# Altium PCB NaviGo v3.0.PcbDoc (part 3 of 4)
Units mm, origin at the board's own origin, x right, y up, seen from the top; angles counter-clockwise.
Board outline 144.78 x 52.07 mm, 2 copper layers (Top Layer, Bottom Layer); 380 components, 29 nets, 1630 pads, 230 vias.
Unrouted connection lines stored in the file: 261.
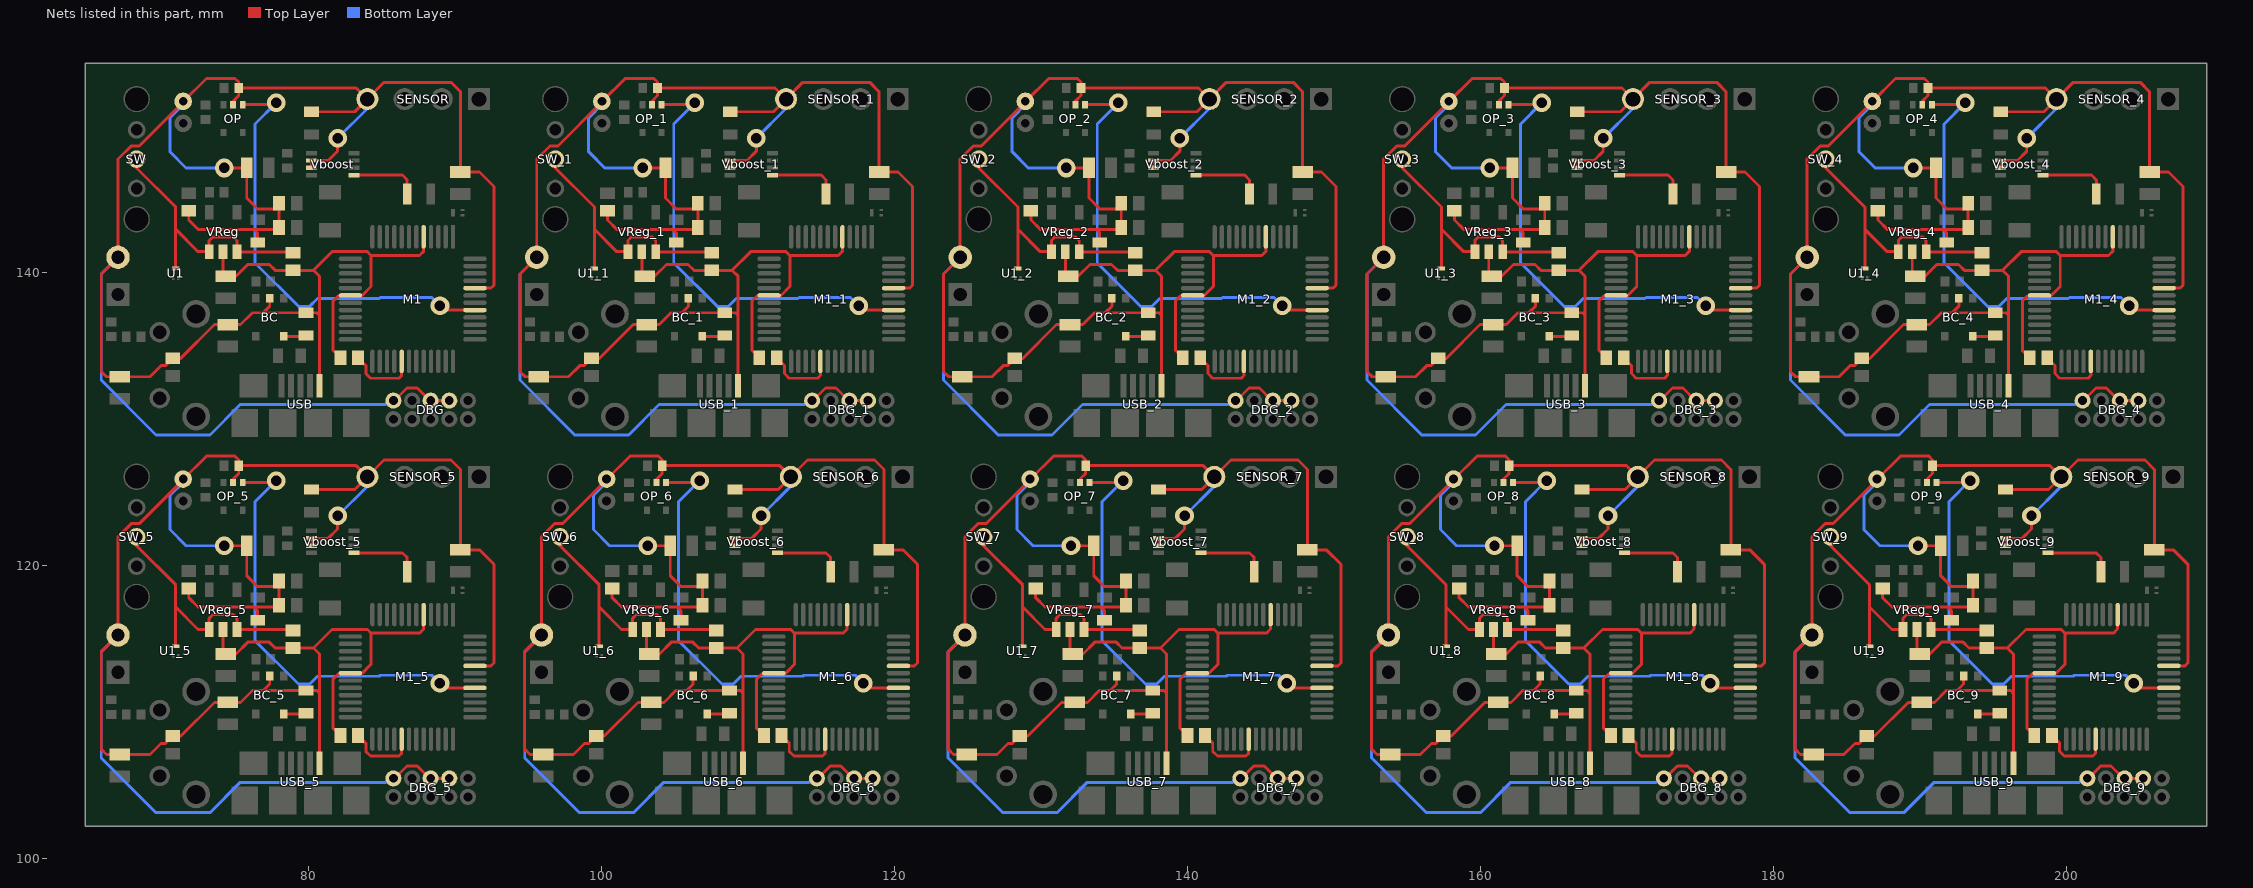
[diagram p3: the nets of this part, all layers, seen from the top]

## Via types
v1: diameter 1.27, hole 0.711, Top Layer to Bottom Layer, 220 vias
v2: diameter 1.1, hole 0.711, Top Layer to Bottom Layer, 10 vias

## Nets (pads, with @x,y where several pads share a name; then routed paths per layer and width w, separated by ;. In a path a pad name is that pad's centre, name@x,y a point inside that pad or via, vN(x,y) a via of type N, cw(c..) or ccw(c..) an arc to the next point about the centre after c; other vN are vias at no path point) (continued)
GND: BC.2 BC_1.2 BC_2.2 BC_3.2 BC_4.2 BC_5.2 BC_6.2 BC_7.2 BC_8.2 BC_9.2 BT1.2 BT1_1.2 BT1_2.2 BT1_3.2 BT1_4.2 BT1_5.2 BT1_6.2 BT1_7.2 BT1_8.2 BT1_9.2 C1.2 C1_1.2 C1_2.2 C1_3.2 C1_4.2 C1_5.2 C1_6.2 C1_7.2 C1_8.2 C1_9.2 C2.2 C2_1.2 C2_2.2 C2_3.2 C2_4.2 C2_5.2 C2_6.2 C2_7.2 C2_8.2 C2_9.2 C4.2 C4_1.2 C4_2.2 C4_3.2 C4_4.2 C4_5.2 C4_6.2 C4_7.2 C4_8.2 C4_9.2 C5.2 C5_1.2 C5_2.2 C5_3.2 C5_4.2 C5_5.2 C5_6.2 C5_7.2 C5_8.2 C5_9.2 C6.2 C6_1.2 C6_2.2 C6_3.2 C6_4.2 C6_5.2 C6_6.2 C6_7.2 C6_8.2 C6_9.2 C7.2 C7_1.2 C7_2.2 C7_3.2 C7_4.2 C7_5.2 C7_6.2 C7_7.2 C7_8.2 C7_9.2 C8.2 C8_1.2 C8_2.2 C8_3.2 C8_4.2 C8_5.2 C8_6.2 C8_7.2 C8_8.2 C8_9.2 C10.2 C10_1.2 C10_2.2 C10_3.2 C10_4.2 C10_5.2 C10_6.2 C10_7.2 C10_8.2 C10_9.2 C11.2 C11_1.2 C11_2.2 C11_3.2 C11_4.2 C11_5.2 C11_6.2 C11_7.2 C11_8.2 C11_9.2 C12.1 C12_1.1 C12_2.1 C12_3.1 C12_4.1 C12_5.1 C12_6.1 C12_7.1 C12_8.1 C12_9.1 C13.1 C13_1.1 C13_2.1 C13_3.1 C13_4.1 C13_5.1 C13_6.1 C13_7.1 C13_8.1 C13_9.1 DBG.6 DBG.8 DBG.9 DBG_1.6 DBG_1.8 DBG_1.9 DBG_2.6 DBG_2.8 DBG_2.9 DBG_3.6 DBG_3.8 DBG_3.9 DBG_4.6 DBG_4.8 DBG_4.9 DBG_5.6 DBG_5.8 DBG_5.9 DBG_6.6 DBG_6.8 DBG_6.9 DBG_7.6 DBG_7.8 DBG_7.9 DBG_8.6 DBG_8.8 DBG_8.9 DBG_9.6 DBG_9.8 DBG_9.9 M1.5 M1.18 M1.44 M1_1.5 M1_1.18 M1_1.44 M1_2.5 M1_2.18 M1_2.44 M1_3.5 M1_3.18 M1_3.44 M1_4.5 M1_4.18 M1_4.44 M1_5.5 M1_5.18 M1_5.44 M1_6.5 M1_6.18 M1_6.44 M1_7.5 M1_7.18 M1_7.44 M1_8.5 M1_8.18 M1_8.44 M1_9.5 M1_9.18 M1_9.44 MOTOR.2 MOTOR_1.2 MOTOR_2.2 MOTOR_3.2 MOTOR_4.2 MOTOR_5.2 MOTOR_6.2 MOTOR_7.2 MOTOR_8.2 MOTOR_9.2 OP.2 OP_1.2 OP_2.2 OP_3.2 OP_4.2 OP_5.2 OP_6.2 OP_7.2 OP_8.2 OP_9.2 R2.2 R2_1.2 R2_2.2 R2_3.2 R2_4.2 R2_5.2 R2_6.2 R2_7.2 R2_8.2 R2_9.2 R5.2 R5_1.2 R5_2.2 R5_3.2 R5_4.2 R5_5.2 R5_6.2 R5_7.2 R5_8.2 R5_9.2 R9.1 R9_1.1 R9_2.1 R9_3.1 R9_4.1 R9_5.1 R9_6.1 R9_7.1 R9_8.1 R9_9.1 R10.2 R10_1.2 R10_2.2 R10_3.2 R10_4.2 R10_5.2 R10_6.2 R10_7.2 R10_8.2 R10_9.2 SENSOR.4 SENSOR_1.4 SENSOR_2.4 SENSOR_3.4 SENSOR_4.4 SENSOR_5.4 SENSOR_6.4 SENSOR_7.4 SENSOR_8.4 SENSOR_9.4 USB.5 USB_1.5 USB_2.5 USB_3.5 USB_4.5 USB_5.5 USB_6.5 USB_7.5 USB_8.5 USB_9.5 Vboost.2 Vboost.3 Vboost_1.2 Vboost_1.3 Vboost_2.2 Vboost_2.3 Vboost_3.2 Vboost_3.3 Vboost_4.2 Vboost_4.3 Vboost_5.2 Vboost_5.3 Vboost_6.2 Vboost_6.3 Vboost_7.2 Vboost_7.3 Vboost_8.2 Vboost_8.3 Vboost_9.2 Vboost_9.3 VReg.2 VReg_1.2 VReg_2.2 VReg_3.2 VReg_4.2 VReg_5.2 VReg_6.2 VReg_7.2 VReg_8.2 VReg_9.2 | length 1830.6
  Top Layer w0.2: C12_5.1@71.831,118.459 71.831,117.824 72.466,117.189 76.276,117.189 ; C12.1@71.831,144.24 71.831,143.605 72.466,142.97 76.276,142.97 ; VReg_5.2@74.178,115.665 74.178,114.183 C10_5.2@74.371,113.99 75.051,113.99 75.856,114.795 77.331,114.795 77.731,114.395 C13_5.1@78.943,114.395 80.34,114.395 ; VReg.2@74.178,141.446 74.178,139.964 C10.2@74.371,139.771 75.051,139.771 75.856,140.576 77.331,140.576 77.731,140.176 C13.1@78.943,140.176 80.34,140.176 ; v1(74.244,121.38) C2_5.2@75.792,121.38 75.792,119.324 76.53,118.586 C5_5.2@77.997,118.586 ; v1(74.244,147.161) C2.2@75.792,147.161 75.792,145.105 76.53,144.367 C5.2@77.997,144.367 ; OP_5.2@74.864,125.698 74.864,125.937 75.244,126.317 R5_5.2@75.244,126.841 ; OP.2@74.864,151.479 74.864,151.718 75.244,152.098 R5.2@75.244,152.622 ; R9_5.1@76.53,116.3 76.53,116.935 76.276,117.189 ; R9.1@76.53,142.081 76.53,142.716 76.276,142.97 ; BC_5.2@77.358,112.49 77.358,111.947 76.911,111.5 ; BC.2@77.358,138.271 77.358,137.728 76.911,137.281 ; C5_5.2@77.997,118.713 C5_5.2@77.997,118.586 ; C5.2@77.997,144.494 C5.2@77.997,144.367 ; Vboost_5.2@80.196,121.88 80.207,121.88 Vboost_5.3@80.207,121.391 ; Vboost.2@80.196,147.661 80.207,147.661 Vboost.3@80.207,147.172 ; Vboost_5.2@80.207,121.891 81.359,121.891 81.991,122.523 v1(81.991,123.412) ; Vboost.2@80.207,147.672 81.359,147.672 81.991,148.304 v1(81.991,149.193) ; R2_5.2@80.213,125.216 83.16,125.216 SENSOR_5.4@84.023,126.079 ; R2.2@80.213,150.997 83.16,150.997 SENSOR.4@84.023,151.86 ; USB_5.5@80.751,106.91 80.751,111.317 ; USB.5@80.751,132.691 80.751,137.098 ; C4_5.2@82.188,108.426 81.691,108.923 81.691,112.293 82.029,112.631 82.815,112.631 M1_5.18@82.865,112.681 83.667,112.681 84.277,113.291 84.277,115.411 ; C4.2@82.188,134.207 81.691,134.704 81.691,138.074 82.029,138.412 82.815,138.412 M1.18@82.865,138.462 83.667,138.462 84.277,139.072 84.277,141.192 ; DBG_5.6@85.801,105.505 85.869,105.505 86.719,106.355 87.423,106.355 88.273,105.505 DBG_5.8@88.341,105.505 DBG_5.9@89.611,105.505 ; DBG_5.6@85.801,105.759 DBG_5.6@85.869,105.759 ; DBG.6@85.801,131.286 85.869,131.286 86.719,132.136 87.423,132.136 88.273,131.286 DBG.8@88.341,131.286 DBG.9@89.611,131.286 ; DBG.6@85.801,131.54 DBG.6@85.869,131.54 ; M1_5.5@87.865,116.681 87.865,115.697 87.579,115.411 84.277,115.411 ; M1.5@87.865,142.462 87.865,141.478 87.579,141.192 84.277,141.192 ; DBG_5.8@88.273,105.759 DBG_5.8@88.341,105.759 ; DBG.8@88.273,131.54 DBG.8@88.341,131.54 ; M1_5.44@91.365,113.181 92.461,113.181 92.659,113.379 92.659,120.11 91.667,121.102 C1_5.2@90.373,121.102 90.373,126.587 89.738,127.222 85.166,127.222 SENSOR_5.4@84.023,126.079 ; M1.44@91.365,138.962 92.461,138.962 92.659,139.16 92.659,145.891 91.667,146.883 C1.2@90.373,146.883 90.373,152.368 89.738,153.003 85.166,153.003 SENSOR.4@84.023,151.86 ; C12_1.1@100.406,144.24 100.406,143.605 101.041,142.97 104.851,142.97 ; C12_6.1@100.731,118.459 100.731,117.824 101.366,117.189 105.176,117.189 ; VReg_1.2@102.753,141.446 102.753,139.964 C10_1.2@102.946,139.771 103.626,139.771 104.431,140.576 105.906,140.576 106.306,140.176 C13_1.1@107.518,140.176 108.915,140.176 ; v1(102.819,147.161) C2_1.2@104.367,147.161 104.367,145.105 105.105,144.367 C5_1.2@106.572,144.367 ; VReg_6.2@103.078,115.665 103.078,114.183 C10_6.2@103.271,113.99 103.951,113.99 104.756,114.795 106.231,114.795 106.631,114.395 C13_6.1@107.843,114.395 109.24,114.395 ; v1(103.144,121.38) C2_6.2@104.692,121.38 104.692,119.324 105.43,118.586 C5_6.2@106.897,118.586 ; OP_1.2@103.439,151.479 103.439,151.718 103.819,152.098 R5_1.2@103.819,152.622 ; OP_6.2@103.764,125.698 103.764,125.937 104.144,126.317 R5_6.2@104.144,126.841 ; R9_1.1@105.105,142.081 105.105,142.716 104.851,142.97 ; R9_6.1@105.43,116.3 105.43,116.935 105.176,117.189 ; BC_1.2@105.933,138.271 105.933,137.728 105.486,137.281 ; BC_6.2@106.258,112.49 106.258,111.947 105.811,111.5 ; C5_1.2@106.572,144.494 C5_1.2@106.572,144.367 ; C5_6.2@106.897,118.713 C5_6.2@106.897,118.586 ; Vboost_1.2@108.771,147.661 108.782,147.661 Vboost_1.3@108.782,147.172 ; Vboost_1.2@108.782,147.672 109.934,147.672 110.566,148.304 v1(110.566,149.193) ; R2_1.2@108.788,150.997 111.735,150.997 SENSOR_1.4@112.598,151.86 ; Vboost_6.2@109.096,121.88 109.107,121.88 Vboost_6.3@109.107,121.391 ; Vboost_6.2@109.107,121.891 110.259,121.891 110.891,122.523 v1(110.891,123.412) ; R2_6.2@109.113,125.216 112.06,125.216 SENSOR_6.4@112.923,126.079 ; USB_1.5@109.326,132.691 109.326,137.098 ; USB_6.5@109.651,106.91 109.651,111.317 ; C4_1.2@110.763,134.207 110.266,134.704 110.266,138.074 110.604,138.412 111.39,138.412 M1_1.18@111.44,138.462 112.242,138.462 112.852,139.072 112.852,141.192 ; C4_6.2@111.088,108.426 110.591,108.923 110.591,112.293 110.929,112.631 111.715,112.631 M1_6.18@111.765,112.681 112.567,112.681 113.177,113.291 113.177,115.411 ; DBG_1.6@114.376,131.286 114.444,131.286 115.294,132.136 115.998,132.136 116.848,131.286 DBG_1.8@116.916,131.286 DBG_1.9@118.186,131.286 ; DBG_1.6@114.376,131.54 DBG_1.6@114.444,131.54 ; DBG_6.6@114.701,105.505 114.769,105.505 115.619,106.355 116.323,106.355 117.173,105.505 DBG_6.8@117.241,105.505 DBG_6.9@118.511,105.505 ; DBG_6.6@114.701,105.759 DBG_6.6@114.769,105.759 ; M1_1.5@116.44,142.462 116.44,141.478 116.154,141.192 112.852,141.192 ; M1_6.5@116.765,116.681 116.765,115.697 116.479,115.411 113.177,115.411 ; DBG_1.8@116.848,131.54 DBG_1.8@116.916,131.54 ; DBG_6.8@117.173,105.759 DBG_6.8@117.241,105.759 ; M1_1.44@119.94,138.962 121.036,138.962 121.234,139.16 121.234,145.891 120.242,146.883 C1_1.2@118.948,146.883 118.948,152.368 118.313,153.003 113.741,153.003 SENSOR_1.4@112.598,151.86 ; M1_6.44@120.265,113.181 121.361,113.181 121.559,113.379 121.559,120.11 120.567,121.102 C1_6.2@119.273,121.102 119.273,126.587 118.638,127.222 114.066,127.222 SENSOR_6.4@112.923,126.079 ; C12_2.1@129.306,144.24 129.306,143.605 129.941,142.97 133.751,142.97 ; C12_7.1@129.631,118.459 129.631,117.824 130.266,117.189 134.076,117.189 ; VReg_2.2@131.653,141.446 131.653,139.964 C10_2.2@131.846,139.771 132.526,139.771 133.331,140.576 134.806,140.576 135.206,140.176 C13_2.1@136.418,140.176 137.815,140.176 ; v1(131.719,147.161) C2_2.2@133.267,147.161 133.267,145.105 134.005,144.367 C5_2.2@135.472,144.367 ; VReg_7.2@131.978,115.665 131.978,114.183 C10_7.2@132.171,113.99 132.851,113.99 133.656,114.795 135.131,114.795 135.531,114.395 C13_7.1@136.743,114.395 138.14,114.395 ; v1(132.044,121.38) C2_7.2@133.592,121.38 133.592,119.324 134.33,118.586 C5_7.2@135.797,118.586 ; OP_2.2@132.339,151.479 132.339,151.718 132.719,152.098 R5_2.2@132.719,152.622 ; OP_7.2@132.664,125.698 132.664,125.937 133.044,126.317 R5_7.2@133.044,126.841 ; R9_2.1@134.005,142.081 134.005,142.716 133.751,142.97 ; R9_7.1@134.33,116.3 134.33,116.935 134.076,117.189 ; BC_2.2@134.833,138.271 134.833,137.728 134.386,137.281 ; BC_7.2@135.158,112.49 135.158,111.947 134.711,111.5 ; C5_2.2@135.472,144.494 C5_2.2@135.472,144.367 ; C5_7.2@135.797,118.713 C5_7.2@135.797,118.586 ; Vboost_2.2@137.671,147.661 137.682,147.661 Vboost_2.3@137.682,147.172 ; Vboost_2.2@137.682,147.672 138.834,147.672 139.466,148.304 v1(139.466,149.193) ; R2_2.2@137.688,150.997 140.635,150.997 SENSOR_2.4@141.498,151.86 ; Vboost_7.2@137.996,121.88 138.007,121.88 Vboost_7.3@138.007,121.391 ; Vboost_7.2@138.007,121.891 139.159,121.891 139.791,122.523 v1(139.791,123.412) ; R2_7.2@138.013,125.216 140.96,125.216 SENSOR_7.4@141.823,126.079 ; USB_2.5@138.226,132.691 138.226,137.098 ; USB_7.5@138.551,106.91 138.551,111.317 ; C4_2.2@139.663,134.207 139.166,134.704 139.166,138.074 139.504,138.412 140.29,138.412 M1_2.18@140.34,138.462 141.142,138.462 141.752,139.072 141.752,141.192 ; C4_7.2@139.988,108.426 139.491,108.923 139.491,112.293 139.829,112.631 140.615,112.631 M1_7.18@140.665,112.681 141.467,112.681 142.077,113.291 142.077,115.411 ; DBG_2.6@143.276,131.286 143.344,131.286 144.194,132.136 144.898,132.136 145.748,131.286 DBG_2.8@145.816,131.286 DBG_2.9@147.086,131.286 ; DBG_2.6@143.276,131.54 DBG_2.6@143.344,131.54 ; DBG_7.6@143.601,105.505 143.669,105.505 144.519,106.355 145.223,106.355 146.073,105.505 DBG_7.8@146.141,105.505 DBG_7.9@147.411,105.505 ; DBG_7.6@143.601,105.759 DBG_7.6@143.669,105.759 ; M1_2.5@145.34,142.462 145.34,141.478 145.054,141.192 141.752,141.192 ; M1_7.5@145.665,116.681 145.665,115.697 145.379,115.411 142.077,115.411 ; DBG_2.8@145.748,131.54 DBG_2.8@145.816,131.54 ; DBG_7.8@146.073,105.759 DBG_7.8@146.141,105.759 ; M1_2.44@148.84,138.962 149.936,138.962 150.134,139.16 150.134,145.891 149.142,146.883 C1_2.2@147.848,146.883 147.848,152.368 147.213,153.003 142.641,153.003 SENSOR_2.4@141.498,151.86 ; M1_7.44@149.165,113.181 150.261,113.181 150.459,113.379 150.459,120.11 149.467,121.102 C1_7.2@148.173,121.102 148.173,126.587 147.538,127.222 142.966,127.222 SENSOR_7.4@141.823,126.079 ; C12_3.1@158.206,144.24 158.206,143.605 158.841,142.97 162.651,142.97 ; C12_8.1@158.531,118.459 158.531,117.824 159.166,117.189 162.976,117.189 ; VReg_3.2@160.553,141.446 160.553,139.964 C10_3.2@160.746,139.771 161.426,139.771 162.231,140.576 163.706,140.576 164.106,140.176 C13_3.1@165.318,140.176 166.715,140.176 ; v1(160.619,147.161) C2_3.2@162.167,147.161 162.167,145.105 162.905,144.367 C5_3.2@164.372,144.367 ; VReg_8.2@160.878,115.665 160.878,114.183 C10_8.2@161.071,113.99 161.751,113.99 162.556,114.795 164.031,114.795 164.431,114.395 C13_8.1@165.643,114.395 167.04,114.395 ; v1(160.944,121.38) C2_8.2@162.492,121.38 162.492,119.324 163.23,118.586 C5_8.2@164.697,118.586 ; OP_3.2@161.239,151.479 161.239,151.718 161.619,152.098 R5_3.2@161.619,152.622 ; OP_8.2@161.564,125.698 161.564,125.937 161.944,126.317 R5_8.2@161.944,126.841 ; R9_3.1@162.905,142.081 162.905,142.716 162.651,142.97 ; R9_8.1@163.23,116.3 163.23,116.935 162.976,117.189 ; BC_3.2@163.733,138.271 163.733,137.728 163.286,137.281 ; BC_8.2@164.058,112.49 164.058,111.947 163.611,111.5 ; C5_3.2@164.372,144.494 C5_3.2@164.372,144.367 ; C5_8.2@164.697,118.713 C5_8.2@164.697,118.586 ; Vboost_3.2@166.571,147.661 166.582,147.661 Vboost_3.3@166.582,147.172 ; Vboost_3.2@166.582,147.672 167.734,147.672 168.366,148.304 v1(168.366,149.193) ; R2_3.2@166.588,150.997 169.535,150.997 SENSOR_3.4@170.398,151.86 ; Vboost_8.2@166.896,121.88 166.907,121.88 Vboost_8.3@166.907,121.391 ; Vboost_8.2@166.907,121.891 168.059,121.891 168.691,122.523 v1(168.691,123.412) ; R2_8.2@166.913,125.216 169.86,125.216 SENSOR_8.4@170.723,126.079 ; USB_3.5@167.126,132.691 167.126,137.098 ; USB_8.5@167.451,106.91 167.451,111.317 ; C4_3.2@168.563,134.207 168.066,134.704 168.066,138.074 168.404,138.412 169.19,138.412 M1_3.18@169.24,138.462 170.042,138.462 170.652,139.072 170.652,141.192 ; C4_8.2@168.888,108.426 168.391,108.923 168.391,112.293 168.729,112.631 169.515,112.631 M1_8.18@169.565,112.681 170.367,112.681 170.977,113.291 170.977,115.411 ; DBG_3.6@172.176,131.286 172.244,131.286 173.094,132.136 173.798,132.136 174.648,131.286 DBG_3.8@174.716,131.286 DBG_3.9@175.986,131.286 ; DBG_3.6@172.176,131.54 DBG_3.6@172.244,131.54 ; DBG_8.6@172.501,105.505 172.569,105.505 173.419,106.355 174.123,106.355 174.973,105.505 DBG_8.8@175.041,105.505 DBG_8.9@176.311,105.505 ; DBG_8.6@172.501,105.759 DBG_8.6@172.569,105.759 ; M1_3.5@174.24,142.462 174.24,141.478 173.954,141.192 170.652,141.192 ; M1_8.5@174.565,116.681 174.565,115.697 174.279,115.411 170.977,115.411 ; DBG_3.8@174.648,131.54 DBG_3.8@174.716,131.54 ; DBG_8.8@174.973,105.759 DBG_8.8@175.041,105.759 ; M1_3.44@177.74,138.962 178.836,138.962 179.034,139.16 179.034,145.891 178.042,146.883 C1_3.2@176.748,146.883 176.748,152.368 176.113,153.003 171.541,153.003 SENSOR_3.4@170.398,151.86 ; M1_8.44@178.065,113.181 179.161,113.181 179.359,113.379 179.359,120.11 178.367,121.102 C1_8.2@177.073,121.102 177.073,126.587 176.438,127.222 171.866,127.222 SENSOR_8.4@170.723,126.079 ; C12_4.1@187.106,144.24 187.106,143.605 187.741,142.97 191.551,142.97 ; C12_9.1@187.431,118.459 187.431,117.824 188.066,117.189 191.876,117.189 ; VReg_4.2@189.453,141.446 189.453,139.964 C10_4.2@189.646,139.771 190.326,139.771 191.131,140.576 192.606,140.576 193.006,140.176 C13_4.1@194.218,140.176 195.615,140.176 ; v1(189.519,147.161) C2_4.2@191.067,147.161 191.067,145.105 191.805,144.367 C5_4.2@193.272,144.367 ; VReg_9.2@189.778,115.665 189.778,114.183 C10_9.2@189.971,113.99 190.651,113.99 191.456,114.795 192.931,114.795 193.331,114.395 C13_9.1@194.543,114.395 195.94,114.395 ; v1(189.844,121.38) C2_9.2@191.392,121.38 191.392,119.324 192.13,118.586 C5_9.2@193.597,118.586 ; OP_4.2@190.139,151.479 190.139,151.718 190.519,152.098 R5_4.2@190.519,152.622 ; OP_9.2@190.464,125.698 190.464,125.937 190.844,126.317 R5_9.2@190.844,126.841 ; R9_4.1@191.805,142.081 191.805,142.716 191.551,142.97 ; R9_9.1@192.13,116.3 192.13,116.935 191.876,117.189 ; BC_4.2@192.633,138.271 192.633,137.728 192.186,137.281 ; BC_9.2@192.958,112.49 192.958,111.947 192.511,111.5 ; C5_4.2@193.272,144.494 C5_4.2@193.272,144.367 ; C5_9.2@193.597,118.713 C5_9.2@193.597,118.586 ; Vboost_4.2@195.471,147.661 195.482,147.661 Vboost_4.3@195.482,147.172 ; Vboost_4.2@195.482,147.672 196.634,147.672 197.266,148.304 v1(197.266,149.193) ; R2_4.2@195.488,150.997 198.435,150.997 SENSOR_4.4@199.298,151.86 ; Vboost_9.2@195.796,121.88 195.807,121.88 Vboost_9.3@195.807,121.391 ; Vboost_9.2@195.807,121.891 196.959,121.891 197.591,122.523 v1(197.591,123.412) ; R2_9.2@195.813,125.216 198.76,125.216 SENSOR_9.4@199.623,126.079 ; USB_4.5@196.026,132.691 196.026,137.098 ; USB_9.5@196.351,106.91 196.351,111.317 ; C4_4.2@197.463,134.207 196.966,134.704 196.966,138.074 197.304,138.412 198.09,138.412 M1_4.18@198.14,138.462 198.942,138.462 199.552,139.072 199.552,141.192 ; C4_9.2@197.788,108.426 197.291,108.923 197.291,112.293 197.629,112.631 198.415,112.631 M1_9.18@198.465,112.681 199.267,112.681 199.877,113.291 199.877,115.411 ; DBG_4.6@201.076,131.286 201.144,131.286 201.994,132.136 202.698,132.136 203.548,131.286 DBG_4.8@203.616,131.286 DBG_4.9@204.886,131.286 ; DBG_4.6@201.076,131.54 DBG_4.6@201.144,131.54 ; DBG_9.6@201.401,105.505 201.469,105.505 202.319,106.355 203.023,106.355 203.873,105.505 DBG_9.8@203.941,105.505 DBG_9.9@205.211,105.505 ; DBG_9.6@201.401,105.759 DBG_9.6@201.469,105.759 ; M1_4.5@203.14,142.462 203.14,141.478 202.854,141.192 199.552,141.192 ; M1_9.5@203.465,116.681 203.465,115.697 203.179,115.411 199.877,115.411 ; DBG_4.8@203.548,131.54 DBG_4.8@203.616,131.54 ; DBG_9.8@203.873,105.759 DBG_9.8@203.941,105.759 ; M1_4.44@206.64,138.962 207.736,138.962 207.934,139.16 207.934,145.891 206.942,146.883 C1_4.2@205.648,146.883 205.648,152.368 205.013,153.003 200.441,153.003 SENSOR_4.4@199.298,151.86 ; M1_9.44@206.965,113.181 208.061,113.181 208.259,113.379 208.259,120.11 207.267,121.102 C1_9.2@205.973,121.102 205.973,126.587 205.338,127.222 200.766,127.222 SENSOR_9.4@199.623,126.079 ; R5_5.2@75.244,126.841 83.261,126.841 SENSOR_5.4@84.023,126.079 ; R5_5.2@75.244,126.841 75.244,127.238 74.991,127.491 73.044,127.491 71.481,125.928 MOTOR_5.2@71.45,125.928 71.45,125.885 68.448,122.883 67.902,122.883 67.005,121.986 BT1_5.2@67.005,115.284 65.862,114.141 65.862,107.493 66.223,107.132 C7_5.2@67.132,107.132 69.183,107.132 69.939,107.888 70.239,107.888 C8_5.2@70.739,108.388 71.285,108.388 73.585,110.688 C11_5.2@74.498,110.688 75.363,110.688 76.175,111.5 76.911,111.5 ; R5.2@75.244,152.622 75.244,153.019 74.991,153.272 73.044,153.272 71.481,151.709 MOTOR.2@71.45,151.709 71.45,151.666 68.448,148.664 67.902,148.664 67.005,147.767 BT1.2@67.005,141.065 65.862,139.922 65.862,133.274 66.223,132.913 C7.2@67.132,132.913 69.183,132.913 69.939,133.669 70.239,133.669 C8.2@70.739,134.169 71.285,134.169 73.585,136.469 C11.2@74.498,136.469 75.363,136.469 76.175,137.281 76.911,137.281 ; R5.2@75.244,152.622 83.261,152.622 SENSOR.4@84.023,151.86 ; 76.276,117.189 77.997,117.189 C6_5.2@77.997,117.316 C5_5.2@77.997,118.586 ; 76.276,142.97 77.997,142.97 C6.2@77.997,143.097 C5.2@77.997,144.367 ; 76.911,111.5 R10_5.2@79.832,111.5 80.568,111.5 80.751,111.317 ; 76.911,137.281 R10.2@79.832,137.281 80.568,137.281 80.751,137.098 ; 80.34,114.395 80.751,113.984 80.751,111.317 ; 80.34,114.395 81.61,115.665 84.023,115.665 84.277,115.411 ; 80.34,140.176 81.61,141.446 84.023,141.446 84.277,141.192 ; 80.34,140.176 80.751,139.765 80.751,137.098 ; R5_1.2@103.819,152.622 111.836,152.622 SENSOR_1.4@112.598,151.86 ; R5_1.2@103.819,152.622 103.819,153.019 103.566,153.272 101.619,153.272 100.056,151.709 MOTOR_1.2@100.025,151.709 100.025,151.666 97.023,148.664 96.477,148.664 95.58,147.767 BT1_1.2@95.58,141.065 94.437,139.922 94.437,133.274 94.798,132.913 C7_1.2@95.707,132.913 97.758,132.913 98.514,133.669 98.814,133.669 C8_1.2@99.314,134.169 99.86,134.169 102.16,136.469 C11_1.2@103.073,136.469 103.938,136.469 104.75,137.281 105.486,137.281 ; R5_6.2@104.144,126.841 112.161,126.841 SENSOR_6.4@112.923,126.079 ; R5_6.2@104.144,126.841 104.144,127.238 103.891,127.491 101.944,127.491 100.381,125.928 MOTOR_6.2@100.35,125.928 100.35,125.885 97.348,122.883 96.802,122.883 95.905,121.986 BT1_6.2@95.905,115.284 94.762,114.141 94.762,107.493 95.123,107.132 C7_6.2@96.032,107.132 98.083,107.132 98.839,107.888 99.139,107.888 C8_6.2@99.639,108.388 100.185,108.388 102.485,110.688 C11_6.2@103.398,110.688 104.263,110.688 105.075,111.5 105.811,111.5 ; 104.851,142.97 106.572,142.97 C6_1.2@106.572,143.097 C5_1.2@106.572,144.367 ; 105.176,117.189 106.897,117.189 C6_6.2@106.897,117.316 C5_6.2@106.897,118.586 ; 105.486,137.281 R10_1.2@108.407,137.281 109.143,137.281 109.326,137.098 ; 105.811,111.5 R10_6.2@108.732,111.5 109.468,111.5 109.651,111.317 ; 108.915,140.176 109.326,139.765 109.326,137.098 ; 108.915,140.176 110.185,141.446 112.598,141.446 112.852,141.192 ; 109.24,114.395 109.651,113.984 109.651,111.317 ; 109.24,114.395 110.51,115.665 112.923,115.665 113.177,115.411 ; R5_2.2@132.719,152.622 140.736,152.622 SENSOR_2.4@141.498,151.86 ; R5_2.2@132.719,152.622 132.719,153.019 132.466,153.272 130.519,153.272 128.956,151.709 MOTOR_2.2@128.925,151.709 128.925,151.666 125.923,148.664 125.377,148.664 124.48,147.767 BT1_2.2@124.48,141.065 123.337,139.922 123.337,133.274 123.698,132.913 C7_2.2@124.607,132.913 126.658,132.913 127.414,133.669 127.714,133.669 C8_2.2@128.214,134.169 128.76,134.169 131.06,136.469 C11_2.2@131.973,136.469 132.838,136.469 133.65,137.281 134.386,137.281 ; R5_7.2@133.044,126.841 141.061,126.841 SENSOR_7.4@141.823,126.079 ; R5_7.2@133.044,126.841 133.044,127.238 132.791,127.491 130.844,127.491 129.281,125.928 MOTOR_7.2@129.25,125.928 129.25,125.885 126.248,122.883 125.702,122.883 124.805,121.986 BT1_7.2@124.805,115.284 123.662,114.141 123.662,107.493 124.023,107.132 C7_7.2@124.932,107.132 126.983,107.132 127.739,107.888 128.039,107.888 C8_7.2@128.539,108.388 129.085,108.388 131.385,110.688 C11_7.2@132.298,110.688 133.163,110.688 133.975,111.5 134.711,111.5 ; 133.751,142.97 135.472,142.97 C6_2.2@135.472,143.097 C5_2.2@135.472,144.367 ; 134.076,117.189 135.797,117.189 C6_7.2@135.797,117.316 C5_7.2@135.797,118.586 ; 134.386,137.281 R10_2.2@137.307,137.281 138.043,137.281 138.226,137.098 ; 134.711,111.5 R10_7.2@137.632,111.5 138.368,111.5 138.551,111.317 ; 137.815,140.176 138.226,139.765 138.226,137.098 ; 137.815,140.176 139.085,141.446 141.498,141.446 141.752,141.192 ; 138.14,114.395 138.551,113.984 138.551,111.317 ; 138.14,114.395 139.41,115.665 141.823,115.665 142.077,115.411 ; R5_3.2@161.619,152.622 169.636,152.622 SENSOR_3.4@170.398,151.86 ; R5_3.2@161.619,152.622 161.619,153.019 161.366,153.272 159.419,153.272 157.856,151.709 MOTOR_3.2@157.825,151.709 157.825,151.666 154.823,148.664 154.277,148.664 153.38,147.767 BT1_3.2@153.38,141.065 152.237,139.922 152.237,133.274 152.598,132.913 C7_3.2@153.507,132.913 155.558,132.913 156.314,133.669 156.614,133.669 C8_3.2@157.114,134.169 157.66,134.169 159.96,136.469 C11_3.2@160.873,136.469 161.738,136.469 162.55,137.281 163.286,137.281 ; R5_8.2@161.944,126.841 169.961,126.841 SENSOR_8.4@170.723,126.079 ; R5_8.2@161.944,126.841 161.944,127.238 161.691,127.491 159.744,127.491 158.181,125.928 MOTOR_8.2@158.15,125.928 158.15,125.885 155.148,122.883 154.602,122.883 153.705,121.986 BT1_8.2@153.705,115.284 152.562,114.141 152.562,107.493 152.923,107.132 C7_8.2@153.832,107.132 155.883,107.132 156.639,107.888 156.939,107.888 C8_8.2@157.439,108.388 157.985,108.388 160.285,110.688 C11_8.2@161.198,110.688 162.063,110.688 162.875,111.5 163.611,111.5 ; 162.651,142.97 164.372,142.97 C6_3.2@164.372,143.097 C5_3.2@164.372,144.367 ; 162.976,117.189 164.697,117.189 C6_8.2@164.697,117.316 C5_8.2@164.697,118.586 ; 163.286,137.281 R10_3.2@166.207,137.281 166.943,137.281 167.126,137.098 ; 163.611,111.5 R10_8.2@166.532,111.5 167.268,111.5 167.451,111.317 ; 166.715,140.176 167.126,139.765 167.126,137.098 ; 166.715,140.176 167.985,141.446 170.398,141.446 170.652,141.192 ; 167.04,114.395 167.451,113.984 167.451,111.317 ; 167.04,114.395 168.31,115.665 170.723,115.665 170.977,115.411 ; R5_4.2@190.519,152.622 198.536,152.622 SENSOR_4.4@199.298,151.86 ; R5_4.2@190.519,152.622 190.519,153.019 190.266,153.272 188.319,153.272 186.756,151.709 MOTOR_4.2@186.725,151.709 186.725,151.666 183.723,148.664 183.177,148.664 182.28,147.767 BT1_4.2@182.28,141.065 181.137,139.922 181.137,133.274 181.498,132.913 C7_4.2@182.407,132.913 184.458,132.913 185.214,133.669 185.514,133.669 C8_4.2@186.014,134.169 186.56,134.169 188.86,136.469 C11_4.2@189.773,136.469 190.638,136.469 191.45,137.281 192.186,137.281 ; R5_9.2@190.844,126.841 198.861,126.841 SENSOR_9.4@199.623,126.079 ; R5_9.2@190.844,126.841 190.844,127.238 190.591,127.491 188.644,127.491 187.081,125.928 MOTOR_9.2@187.05,125.928 187.05,125.885 184.048,122.883 183.502,122.883 182.605,121.986 BT1_9.2@182.605,115.284 181.462,114.141 181.462,107.493 181.823,107.132 C7_9.2@182.732,107.132 184.783,107.132 185.539,107.888 185.839,107.888 C8_9.2@186.339,108.388 186.885,108.388 189.185,110.688 C11_9.2@190.098,110.688 190.963,110.688 191.775,111.5 192.511,111.5 ; 191.551,142.97 193.272,142.97 C6_4.2@193.272,143.097 C5_4.2@193.272,144.367 ; 191.876,117.189 193.597,117.189 C6_9.2@193.597,117.316 C5_9.2@193.597,118.586 ; 192.186,137.281 R10_4.2@195.107,137.281 195.843,137.281 196.026,137.098 ; 192.511,111.5 R10_9.2@195.432,111.5 196.168,111.5 196.351,111.317 ; 195.615,140.176 196.026,139.765 196.026,137.098 ; 195.615,140.176 196.885,141.446 199.298,141.446 199.552,141.192 ; 195.94,114.395 196.351,113.984 196.351,111.317 ; 195.94,114.395 197.21,115.665 199.623,115.665 199.877,115.411
  Bottom Layer w0.2: BT1_5.2@67.005,115.284 65.862,114.141 65.862,106.902 69.601,103.163 73.279,103.163 75.348,105.232 85.274,105.232 DBG_5.6@85.801,105.759 ; BT1.2@67.005,141.065 65.862,139.922 65.862,132.683 69.601,128.944 73.279,128.944 75.348,131.013 85.274,131.013 DBG.6@85.801,131.54 ; MOTOR_5.2@71.45,125.928 71.45,125.701 70.55,124.801 70.55,122.481 71.651,121.38 v1(74.244,121.38) ; MOTOR.2@71.45,151.709 71.45,151.482 70.55,150.582 70.55,148.262 71.651,147.161 v1(74.244,147.161) ; v1(81.991,123.412) 84.023,125.444 SENSOR_5.4@84.023,126.079 ; v1(81.991,149.193) 84.023,151.225 SENSOR.4@84.023,151.86 ; BT1_1.2@95.58,141.065 94.437,139.922 94.437,132.683 98.176,128.944 101.854,128.944 103.923,131.013 113.849,131.013 DBG_1.6@114.376,131.54 ; BT1_6.2@95.905,115.284 94.762,114.141 94.762,106.902 98.501,103.163 102.179,103.163 104.248,105.232 114.174,105.232 DBG_6.6@114.701,105.759 ; MOTOR_1.2@100.025,151.709 100.025,151.482 99.125,150.582 99.125,148.262 100.226,147.161 v1(102.819,147.161) ; MOTOR_6.2@100.35,125.928 100.35,125.701 99.45,124.801 99.45,122.481 100.551,121.38 v1(103.144,121.38) ; v1(110.566,149.193) 112.598,151.225 SENSOR_1.4@112.598,151.86 ; v1(110.891,123.412) 112.923,125.444 SENSOR_6.4@112.923,126.079 ; BT1_2.2@124.48,141.065 123.337,139.922 123.337,132.683 127.076,128.944 130.754,128.944 132.823,131.013 142.749,131.013 DBG_2.6@143.276,131.54 ; BT1_7.2@124.805,115.284 123.662,114.141 123.662,106.902 127.401,103.163 131.079,103.163 133.148,105.232 143.074,105.232 DBG_7.6@143.601,105.759 ; MOTOR_2.2@128.925,151.709 128.925,151.482 128.025,150.582 128.025,148.262 129.126,147.161 v1(131.719,147.161) ; MOTOR_7.2@129.25,125.928 129.25,125.701 128.35,124.801 128.35,122.481 129.451,121.38 v1(132.044,121.38) ; v1(139.466,149.193) 141.498,151.225 SENSOR_2.4@141.498,151.86 ; v1(139.791,123.412) 141.823,125.444 SENSOR_7.4@141.823,126.079 ; BT1_3.2@153.38,141.065 152.237,139.922 152.237,132.683 155.976,128.944 159.654,128.944 161.723,131.013 171.649,131.013 DBG_3.6@172.176,131.54 ; BT1_8.2@153.705,115.284 152.562,114.141 152.562,106.902 156.301,103.163 159.979,103.163 162.048,105.232 171.974,105.232 DBG_8.6@172.501,105.759 ; MOTOR_3.2@157.825,151.709 157.825,151.482 156.925,150.582 156.925,148.262 158.026,147.161 v1(160.619,147.161) ; MOTOR_8.2@158.15,125.928 158.15,125.701 157.25,124.801 157.25,122.481 158.351,121.38 v1(160.944,121.38) ; v1(168.366,149.193) 170.398,151.225 SENSOR_3.4@170.398,151.86 ; v1(168.691,123.412) 170.723,125.444 SENSOR_8.4@170.723,126.079 ; BT1_4.2@182.28,141.065 181.137,139.922 181.137,132.683 184.876,128.944 188.554,128.944 190.623,131.013 200.549,131.013 DBG_4.6@201.076,131.54 ; BT1_9.2@182.605,115.284 181.462,114.141 181.462,106.902 185.201,103.163 188.879,103.163 190.948,105.232 200.874,105.232 DBG_9.6@201.401,105.759 ; MOTOR_4.2@186.725,151.709 186.725,151.482 185.825,150.582 185.825,148.262 186.926,147.161 v1(189.519,147.161) ; MOTOR_9.2@187.05,125.928 187.05,125.701 186.15,124.801 186.15,122.481 187.251,121.38 v1(189.844,121.38) ; v1(197.266,149.193) 199.298,151.225 SENSOR_4.4@199.298,151.86 ; v1(197.591,123.412) 199.623,125.444 SENSOR_9.4@199.623,126.079
MOTOR: M1.41 M1_1.41 M1_2.41 M1_3.41 M1_4.41 M1_5.41 M1_6.41 M1_7.41 M1_8.41 M1_9.41 OP.1 OP_1.1 OP_2.1 OP_3.1 OP_4.1 OP_5.1 OP_6.1 OP_7.1 OP_8.1 OP_9.1 | length 307.1
  Top Layer w0.2: OP_5.1@75.514,125.698 77.673,125.698 v1(77.8,125.825) ; OP.1@75.514,151.479 77.673,151.479 v1(77.8,151.606) ; v1(88.976,111.982) 89.277,111.681 M1_5.41@91.365,111.681 ; v1(88.976,137.763) 89.277,137.462 M1.41@91.365,137.462 ; OP_1.1@104.089,151.479 106.248,151.479 v1(106.375,151.606) ; OP_6.1@104.414,125.698 106.573,125.698 v1(106.7,125.825) ; v1(117.551,137.763) 117.852,137.462 M1_1.41@119.94,137.462 ; v1(117.876,111.982) 118.177,111.681 M1_6.41@120.265,111.681 ; OP_2.1@132.989,151.479 135.148,151.479 v1(135.275,151.606) ; OP_7.1@133.314,125.698 135.473,125.698 v1(135.6,125.825) ; v1(146.451,137.763) 146.752,137.462 M1_2.41@148.84,137.462 ; v1(146.776,111.982) 147.077,111.681 M1_7.41@149.165,111.681 ; OP_3.1@161.889,151.479 164.048,151.479 v1(164.175,151.606) ; OP_8.1@162.214,125.698 164.373,125.698 v1(164.5,125.825) ; v1(175.351,137.763) 175.652,137.462 M1_3.41@177.74,137.462 ; v1(175.676,111.982) 175.977,111.681 M1_8.41@178.065,111.681 ; OP_4.1@190.789,151.479 192.948,151.479 v1(193.075,151.606) ; OP_9.1@191.114,125.698 193.273,125.698 v1(193.4,125.825) ; v1(204.251,137.763) 204.552,137.462 M1_4.41@206.64,137.462 ; v1(204.576,111.982) 204.877,111.681 M1_9.41@206.965,111.681
  Bottom Layer w0.2: v1(77.8,125.825) 76.357,124.382 76.357,114.897 79.318,111.936 80.092,111.936 80.627,112.471 84.835,112.471 84.905,112.541 88.417,112.541 v1(88.976,111.982) ; v1(77.8,151.606) 76.357,150.163 76.357,140.678 79.318,137.717 80.092,137.717 80.627,138.252 84.835,138.252 84.905,138.322 88.417,138.322 v1(88.976,137.763) ; v1(106.375,151.606) 104.932,150.163 104.932,140.678 107.893,137.717 108.667,137.717 109.202,138.252 113.41,138.252 113.48,138.322 116.992,138.322 v1(117.551,137.763) ; v1(106.7,125.825) 105.257,124.382 105.257,114.897 108.218,111.936 108.992,111.936 109.527,112.471 113.735,112.471 113.805,112.541 117.317,112.541 v1(117.876,111.982) ; v1(135.275,151.606) 133.832,150.163 133.832,140.678 136.793,137.717 137.567,137.717 138.102,138.252 142.31,138.252 142.38,138.322 145.892,138.322 v1(146.451,137.763) ; v1(135.6,125.825) 134.157,124.382 134.157,114.897 137.118,111.936 137.892,111.936 138.427,112.471 142.635,112.471 142.705,112.541 146.217,112.541 v1(146.776,111.982) ; v1(164.175,151.606) 162.732,150.163 162.732,140.678 165.693,137.717 166.467,137.717 167.002,138.252 171.21,138.252 171.28,138.322 174.792,138.322 v1(175.351,137.763) ; v1(164.5,125.825) 163.057,124.382 163.057,114.897 166.018,111.936 166.792,111.936 167.327,112.471 171.535,112.471 171.605,112.541 175.117,112.541 v1(175.676,111.982) ; v1(193.075,151.606) 191.632,150.163 191.632,140.678 194.593,137.717 195.367,137.717 195.902,138.252 200.11,138.252 200.18,138.322 203.692,138.322 v1(204.251,137.763) ; v1(193.4,125.825) 191.957,124.382 191.957,114.897 194.918,111.936 195.692,111.936 196.227,112.471 200.435,112.471 200.505,112.541 204.017,112.541 v1(204.576,111.982)
NetBC_5: BC.5 BC_1.5 BC_2.5 BC_3.5 BC_4.5 BC_5.5 BC_6.5 BC_7.5 BC_8.5 BC_9.5 R10.1 R10_1.1 R10_2.1 R10_3.1 R10_4.1 R10_5.1 R10_6.1 R10_7.1 R10_8.1 R10_9.1 | length 15.5
  Top Layer w0.2: BC_5.5@78.308,109.89 79.772,109.89 R10_5.1@79.832,109.95 ; BC.5@78.308,135.671 79.772,135.671 R10.1@79.832,135.731 ; BC_1.5@106.883,135.671 108.347,135.671 R10_1.1@108.407,135.731 ; BC_6.5@107.208,109.89 108.672,109.89 R10_6.1@108.732,109.95 ; BC_2.5@135.783,135.671 137.247,135.671 R10_2.1@137.307,135.731 ; BC_7.5@136.108,109.89 137.572,109.89 R10_7.1@137.632,109.95 ; BC_3.5@164.683,135.671 166.147,135.671 R10_3.1@166.207,135.731 ; BC_8.5@165.008,109.89 166.472,109.89 R10_8.1@166.532,109.95 ; BC_4.5@193.583,135.671 195.047,135.671 R10_4.1@195.107,135.731 ; BC_9.5@193.908,109.89 195.372,109.89 R10_9.1@195.432,109.95
NetC4_1: C4.1 C4_1.1 C4_2.1 C4_3.1 C4_4.1 C4_5.1 C4_6.1 C4_7.1 C4_8.1 C4_9.1 M1.29 M1_1.29 M1_2.29 M1_3.29 M1_4.29 M1_5.29 M1_6.29 M1_7.29 M1_8.29 M1_9.29 | length 49.3
  Top Layer w0.2: C4_5.1@83.388,108.426 83.915,107.899 83.915,107.345 84.231,107.029 86.182,107.029 86.365,107.212 M1_5.29@86.365,108.181 ; C4.1@83.388,134.207 83.915,133.68 83.915,133.126 84.231,132.81 86.182,132.81 86.365,132.993 M1.29@86.365,133.962 ; C4_1.1@111.963,134.207 112.49,133.68 112.49,133.126 112.806,132.81 114.757,132.81 114.94,132.993 M1_1.29@114.94,133.962 ; C4_6.1@112.288,108.426 112.815,107.899 112.815,107.345 113.131,107.029 115.082,107.029 115.265,107.212 M1_6.29@115.265,108.181 ; C4_2.1@140.863,134.207 141.39,133.68 141.39,133.126 141.706,132.81 143.657,132.81 143.84,132.993 M1_2.29@143.84,133.962 ; C4_7.1@141.188,108.426 141.715,107.899 141.715,107.345 142.031,107.029 143.982,107.029 144.165,107.212 M1_7.29@144.165,108.181 ; C4_3.1@169.763,134.207 170.29,133.68 170.29,133.126 170.606,132.81 172.557,132.81 172.74,132.993 M1_3.29@172.74,133.962 ; C4_8.1@170.088,108.426 170.615,107.899 170.615,107.345 170.931,107.029 172.882,107.029 173.065,107.212 M1_8.29@173.065,108.181 ; C4_4.1@198.663,134.207 199.19,133.68 199.19,133.126 199.506,132.81 201.457,132.81 201.64,132.993 M1_4.29@201.64,133.962 ; C4_9.1@198.988,108.426 199.515,107.899 199.515,107.345 199.831,107.029 201.782,107.029 201.965,107.212 M1_9.29@201.965,108.181
NetC13_2: C13.2 C13_1.2 C13_2.2 C13_3.2 C13_4.2 C13_5.2 C13_6.2 C13_7.2 C13_8.2 C13_9.2 SW.2 SW_1.2 SW_2.2 SW_3.2 SW_4.2 SW_5.2 SW_6.2 SW_7.2 SW_8.2 SW_9.2 U1.1 U1_1.1 U1_2.1 U1_3.1 U1_4.1 U1_5.1 U1_6.1 U1_7.1 U1_8.1 U1_9.1 VReg.1 VReg.3 VReg_1.1 VReg_1.3 VReg_2.1 VReg_2.3 VReg_3.1 VReg_3.3 VReg_4.1 VReg_4.3 VReg_5.1 VReg_5.3 VReg_6.1 VReg_6.3 VReg_7.1 VReg_7.3 VReg_8.1 VReg_8.3 VReg_9.1 VReg_9.3 | length 189.3
  Top Layer w0.2: SW_5.2@68.275,121.983 68.275,121.38 70.942,118.713 70.942,117.189 ; SW.2@68.275,147.764 68.275,147.161 70.942,144.494 70.942,142.97 ; U1_5.1@70.942,114.522 70.942,117.189 ; U1.1@70.942,140.303 70.942,142.97 ; C13_5.2@78.934,115.65 75.143,115.65 VReg_5.3@75.128,115.665 75.128,116.432 74.879,116.681 73.482,116.681 73.228,116.427 VReg_5.1@73.228,115.665 72.466,115.665 70.942,117.189 ; C13.2@78.934,141.431 75.143,141.431 VReg.3@75.128,141.446 75.128,142.213 74.879,142.462 73.482,142.462 73.228,142.208 VReg.1@73.228,141.446 72.466,141.446 70.942,142.97 ; SW_1.2@96.85,147.764 96.85,147.161 99.517,144.494 99.517,142.97 ; SW_6.2@97.175,121.983 97.175,121.38 99.842,118.713 99.842,117.189 ; U1_1.1@99.517,140.303 99.517,142.97 ; U1_6.1@99.842,114.522 99.842,117.189 ; C13_1.2@107.509,141.431 103.718,141.431 VReg_1.3@103.703,141.446 103.703,142.213 103.454,142.462 102.057,142.462 101.803,142.208 VReg_1.1@101.803,141.446 101.041,141.446 99.517,142.97 ; C13_6.2@107.834,115.65 104.043,115.65 VReg_6.3@104.028,115.665 104.028,116.432 103.779,116.681 102.382,116.681 102.128,116.427 VReg_6.1@102.128,115.665 101.366,115.665 99.842,117.189 ; SW_2.2@125.75,147.764 125.75,147.161 128.417,144.494 128.417,142.97 ; SW_7.2@126.075,121.983 126.075,121.38 128.742,118.713 128.742,117.189 ; U1_2.1@128.417,140.303 128.417,142.97 ; U1_7.1@128.742,114.522 128.742,117.189 ; C13_2.2@136.409,141.431 132.618,141.431 VReg_2.3@132.603,141.446 132.603,142.213 132.354,142.462 130.957,142.462 130.703,142.208 VReg_2.1@130.703,141.446 129.941,141.446 128.417,142.97 ; C13_7.2@136.734,115.65 132.943,115.65 VReg_7.3@132.928,115.665 132.928,116.432 132.679,116.681 131.282,116.681 131.028,116.427 VReg_7.1@131.028,115.665 130.266,115.665 128.742,117.189 ; SW_3.2@154.65,147.764 154.65,147.161 157.317,144.494 157.317,142.97 ; SW_8.2@154.975,121.983 154.975,121.38 157.642,118.713 157.642,117.189 ; U1_3.1@157.317,140.303 157.317,142.97 ; U1_8.1@157.642,114.522 157.642,117.189 ; C13_3.2@165.309,141.431 161.518,141.431 VReg_3.3@161.503,141.446 161.503,142.213 161.254,142.462 159.857,142.462 159.603,142.208 VReg_3.1@159.603,141.446 158.841,141.446 157.317,142.97 ; C13_8.2@165.634,115.65 161.843,115.65 VReg_8.3@161.828,115.665 161.828,116.432 161.579,116.681 160.182,116.681 159.928,116.427 VReg_8.1@159.928,115.665 159.166,115.665 157.642,117.189 ; SW_4.2@183.55,147.764 183.55,147.161 186.217,144.494 186.217,142.97 ; SW_9.2@183.875,121.983 183.875,121.38 186.542,118.713 186.542,117.189 ; U1_4.1@186.217,140.303 186.217,142.97 ; U1_9.1@186.542,114.522 186.542,117.189 ; C13_4.2@194.209,141.431 190.418,141.431 VReg_4.3@190.403,141.446 190.403,142.213 190.154,142.462 188.757,142.462 188.503,142.208 VReg_4.1@188.503,141.446 187.741,141.446 186.217,142.97 ; C13_9.2@194.534,115.65 190.743,115.65 VReg_9.3@190.728,115.665 190.728,116.432 190.479,116.681 189.082,116.681 188.828,116.427 VReg_9.1@188.828,115.665 188.066,115.665 186.542,117.189
NetL1_2: L1.2 L1_1.2 L1_2.2 L1_3.2 L1_4.2 L1_5.2 L1_6.2 L1_7.2 L1_8.2 L1_9.2 Vboost.5 Vboost_1.5 Vboost_2.5 Vboost_3.5 Vboost_4.5 Vboost_5.5 Vboost_6.5 Vboost_7.5 Vboost_8.5 Vboost_9.5 | length 47.3
  Top Layer w0.2: Vboost_5.5@83.107,120.891 86.417,120.891 86.741,120.567 L1_5.2@86.741,119.602 ; Vboost.5@83.107,146.672 86.417,146.672 86.741,146.348 L1.2@86.741,145.383 ; Vboost_1.5@111.682,146.672 114.992,146.672 115.316,146.348 L1_1.2@115.316,145.383 ; Vboost_6.5@112.007,120.891 115.317,120.891 115.641,120.567 L1_6.2@115.641,119.602 ; Vboost_2.5@140.582,146.672 143.892,146.672 144.216,146.348 L1_2.2@144.216,145.383 ; Vboost_7.5@140.907,120.891 144.217,120.891 144.541,120.567 L1_7.2@144.541,119.602 ; Vboost_3.5@169.482,146.672 172.792,146.672 173.116,146.348 L1_3.2@173.116,145.383 ; Vboost_8.5@169.807,120.891 173.117,120.891 173.441,120.567 L1_8.2@173.441,119.602 ; Vboost_4.5@198.382,146.672 201.692,146.672 202.016,146.348 L1_4.2@202.016,145.383 ; Vboost_9.5@198.707,120.891 202.017,120.891 202.341,120.567 L1_9.2@202.341,119.602